# EAGLE board DistributedVisionSchematicPage1_3 4 (EAGLE 9.6.2), part 1 of 2
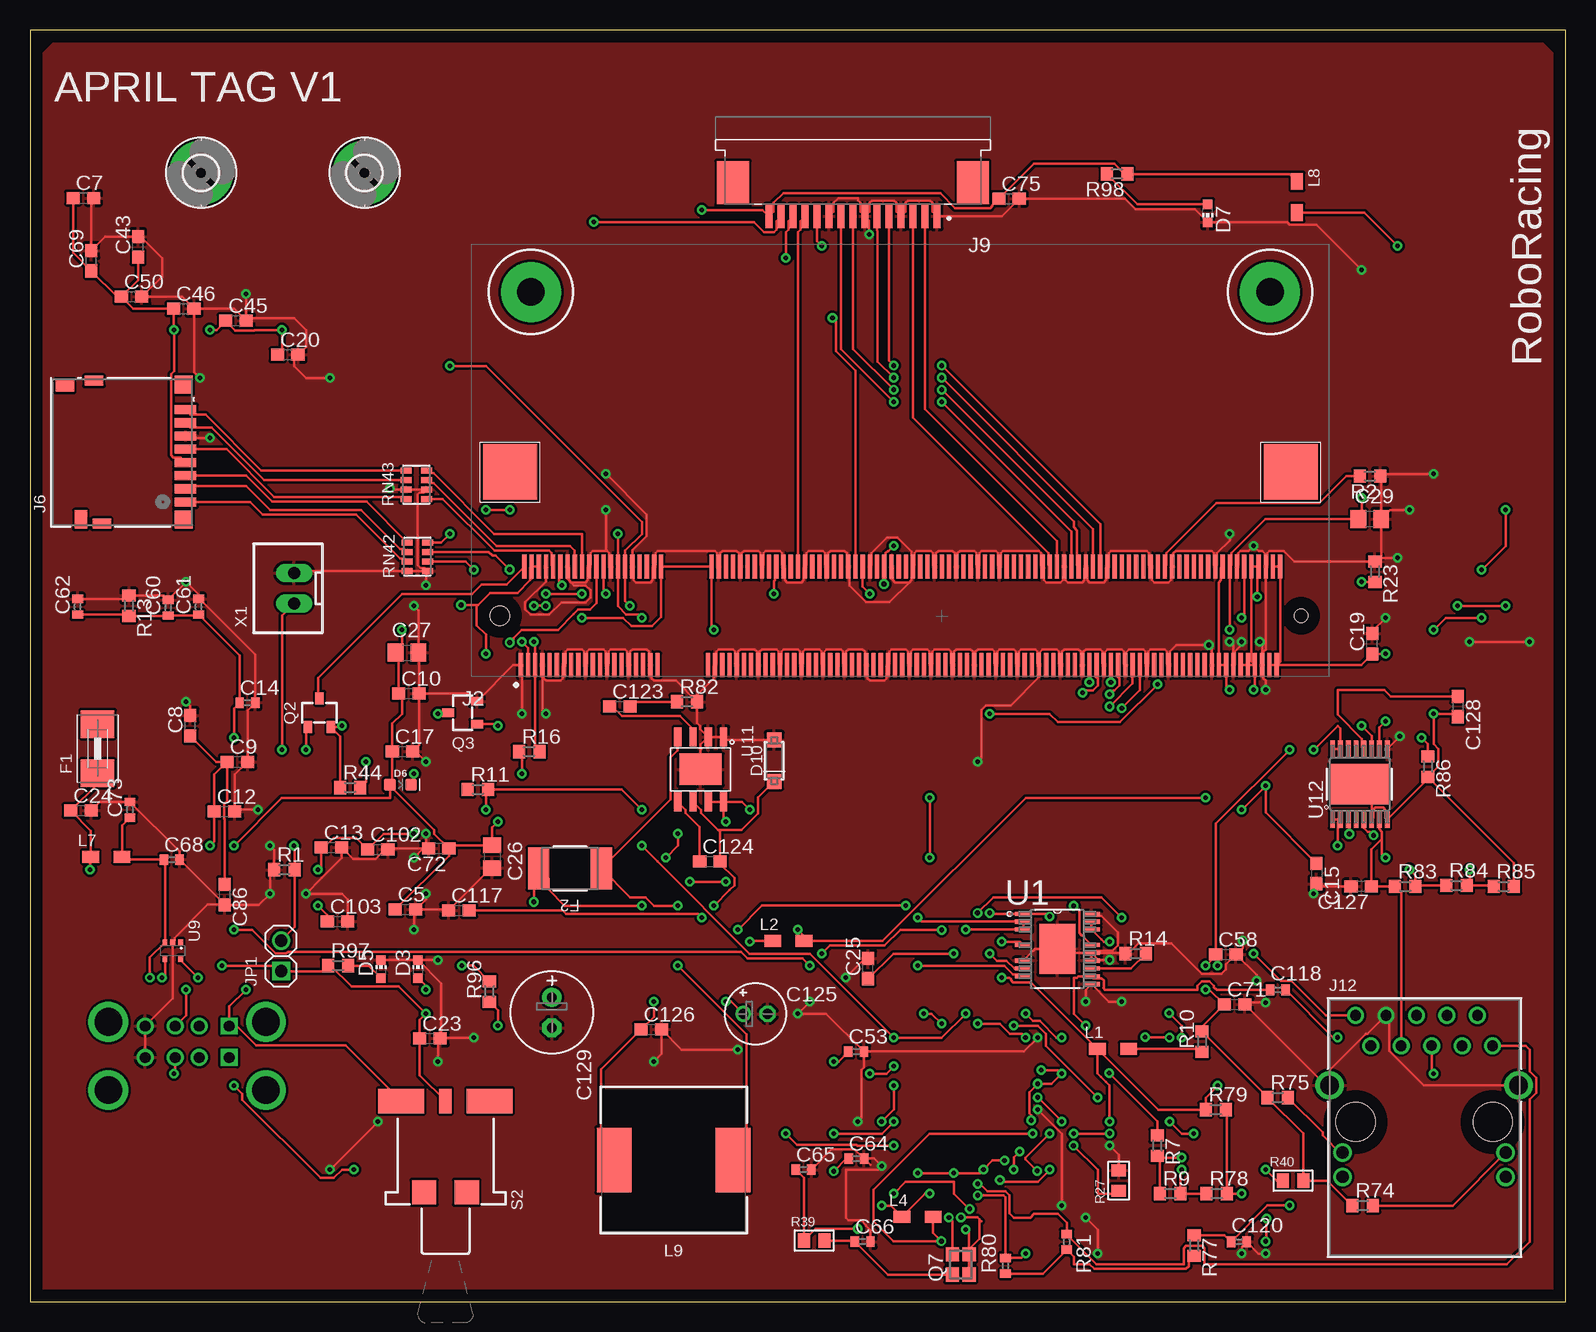
[diagram p0: board, top side]
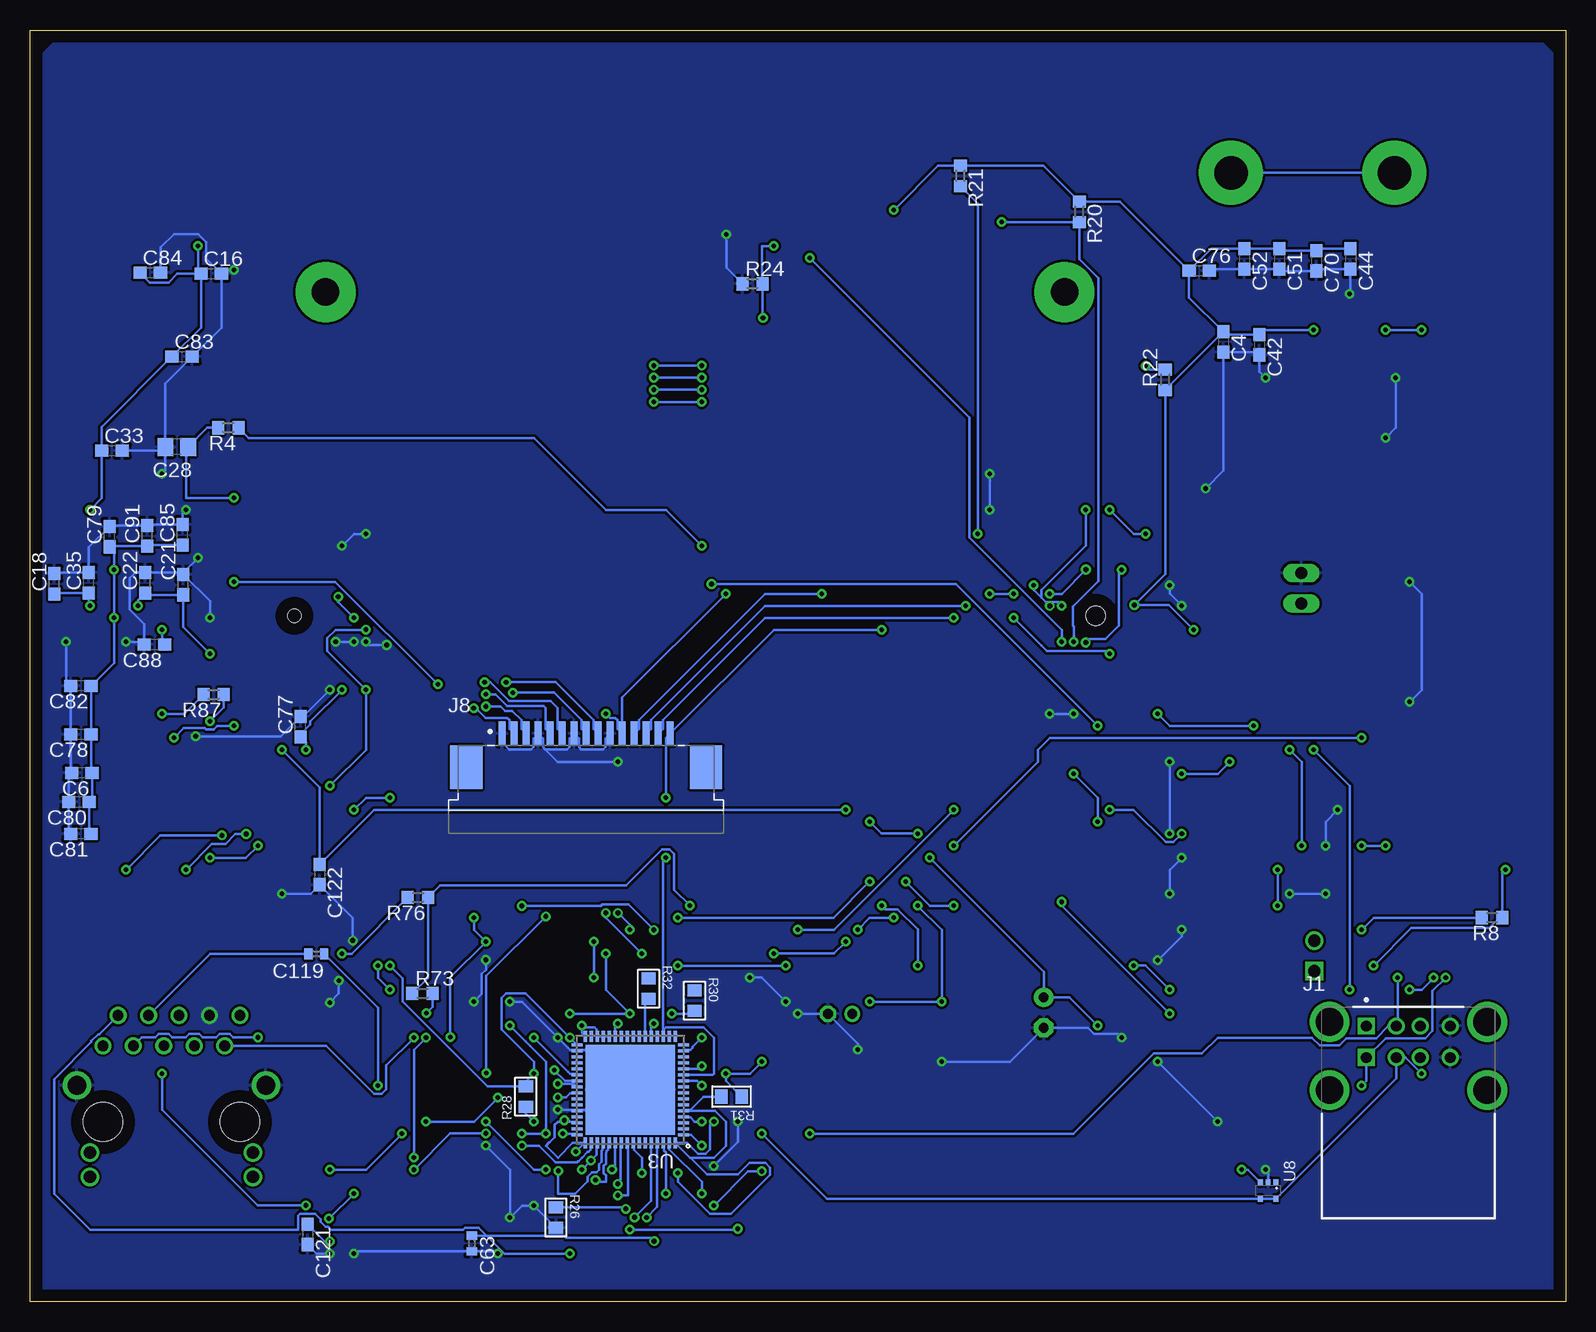
[diagram p1: board, bottom side, seen from below]

Size 128 x 106 mm. Coordinates in mm from the lower left corner, seen from the top.
Outline: 0,0 128,0 128,106 0,106 0,0
Copper layers (1*16): Top 0.035mm / dielectric 1.5mm / Bottom 0.035mm
Design rules "default": minimum track width 6mil, minimum drill 0.35mm, track to track 6mil, track to pad 6mil, pad to pad 6mil, via to via 6mil, smd to smd 6mil, copper to edge 40mil, drill to drill 6mil, minimum pad ring 10mil, minimum via ring 8mil, stop-mask expansion 4mil, vias tented up to drill 0mil, thermal gap 10mil
Net classes: 0 default: width 0.203 mm, drill 0.4 mm, clearance 0.203 mm; 1 power: width 0.203 mm, drill 0.4 mm, clearance 0.203 mm to class 0, clearance 0.203 mm; 2 ethernet: width 0.16 mm, drill 0.3 mm, clearance 0.152 mm; 3 spi: width 0.207 mm, drill 0.35 mm

## Footprints (pad centres in the part's own frame; a part is rotated, then mirrored left to right if it is on the bottom)
C0603 = smd 1.1 x 1: 1 -0.85,0; 2 0.85,0
C0402 = smd 0.7 x 0.9: 1 -0.65,0; 2 0.65,0
C0805 = smd 1.3 x 1.5: 1 -0.95,0; 2 0.95,0
E2-5 = drill 0.813 pad 1.27: + -1.016,0 | drill 0.813 pad 1.27 octagon: - 1.016,0
E2,5-7 = drill 0.813 pad 1.6: + -1.27,0 | drill 0.813 pad 1.6 octagon: - 1.27,0
CHIP-LED0603 = smd 0.8 x 0.8: A 0,-0.75; C 0,0.75
LED-0603 = smd 1 x 1: A -0.877,0; C 0.877,0
SOD123FL_DIO = smd 1.25 x 1.22: 1 -1.725,0; 2 1.725,0
1812 = smd 2.286 x 2.794: 1 -2.046,0; 2 2.046,0
0ZCG_BEL = smd 1.778 x 3.505: 1 -2.616,0; 2 2.616,0
2,8-PAD = drill 2.8 pad 5.334: B2,8 0,0
SAMTEC_USBR-A-D-F-O-TH = drill 0.9 square: A01 0,0; B01 0,-2.62 | drill 0.9: A02 2.5,0; A03 4.5,0; A04 7,0; B02 2.5,-2.62; B03 4.5,-2.62; B04 7,-2.62 | drill 2.3: S1 -3.07,0.35; S2 10.07,0.35; S3 10.07,-5.33; S4 -3.07,-5.33
TE_1473149-4_WITH_CM3PLUS = smd 0.35 x 2: 1 -35.1,-4.1; 2 -34.8,4.1; 3 -34.5,-4.1; 4 -34.2,4.1; 5 -33.9,-4.1; 6 -33.6,4.1; 7 -33.3,-4.1; 8 -33,4.1; 9 -32.7,-4.1; 10 -32.4,4.1; 11 -32.1,-4.1; 12 -31.8,4.1; 13 -31.5,-4.1; 14 -31.2,4.1; 15 -30.9,-4.1; 16 -30.6,4.1; 17 -30.3,-4.1; 18 -30,4.1; 19 -29.7,-4.1; 20 -29.4,4.1; 21 -29.1,-4.1; 22 -28.8,4.1; 23 -28.5,-4.1; 24 -28.2,4.1; 25 -27.9,-4.1; 26 -27.6,4.1; 27 -27.3,-4.1; 28 -27,4.1; 29 -26.7,-4.1; 30 -26.4,4.1; 31 -26.1,-4.1; 32 -25.8,4.1; 33 -25.5,-4.1; 34 -25.2,4.1; 35 -24.9,-4.1; 36 -24.6,4.1; 37 -24.3,-4.1; 38 -24,4.1; 39 -23.7,-4.1; 40 -23.4,4.1; 41 -19.5,-4.1; 42 -19.2,4.1; 43 -18.9,-4.1; 44 -18.6,4.1; 45 -18.3,-4.1; 46 -18,4.1; 47 -17.7,-4.1; 48 -17.4,4.1; 49 -17.1,-4.1; 50 -16.8,4.1; 51 -16.5,-4.1; 52 -16.2,4.1; 53 -15.9,-4.1; 54 -15.6,4.1; 55 -15.3,-4.1; 56 -15,4.1; 57 -14.7,-4.1; 58 -14.4,4.1; 59 -14.1,-4.1; 60 -13.8,4.1; 61 -13.5,-4.1; 62 -13.2,4.1; 63 -12.9,-4.1; 64 -12.6,4.1; 65 -12.3,-4.1; 66 -12,4.1; 67 -11.7,-4.1; 68 -11.4,4.1; 69 -11.1,-4.1; 70 -10.8,4.1; 71 -10.5,-4.1; 72 -10.2,4.1; 73 -9.9,-4.1; 74 -9.6,4.1; 75 -9.3,-4.1; 76 -9,4.1; 77 -8.7,-4.1; 78 -8.4,4.1; 79 -8.1,-4.1; 80 -7.8,4.1; 81 -7.5,-4.1; 82 -7.2,4.1; 83 -6.9,-4.1; 84 -6.6,4.1; 85 -6.3,-4.1; 86 -6,4.1; 87 -5.7,-4.1; 88 -5.4,4.1; 89 -5.1,-4.1; 90 -4.8,4.1; 91 -4.5,-4.1; 92 -4.2,4.1; 93 -3.9,-4.1; 94 -3.6,4.1; 95 -3.3,-4.1; 96 -3,4.1; 97 -2.7,-4.1; 98 -2.4,4.1; 99 -2.1,-4.1; 100 -1.8,4.1; 101 -1.5,-4.1; 102 -1.2,4.1; 103 -0.9,-4.1; 104 -0.6,4.1; 105 -0.3,-4.1; 106 0,4.1; 107 0.3,-4.1; 108 0.6,4.1; 109 0.9,-4.1; 110 1.2,4.1; 111 1.5,-4.1; 112 1.8,4.1; 113 2.1,-4.1; 114 2.4,4.1; 115 2.7,-4.1; 116 3,4.1; 117 3.3,-4.1; 118 3.6,4.1; 119 3.9,-4.1; 120 4.2,4.1; 121 4.5,-4.1; 122 4.8,4.1; 123 5.1,-4.1; 124 5.4,4.1; 125 5.7,-4.1; 126 6,4.1; 127 6.3,-4.1; 128 6.6,4.1; 129 6.9,-4.1; 130 7.2,4.1; 131 7.5,-4.1; 132 7.8,4.1; 133 8.1,-4.1; 134 8.4,4.1; 135 8.7,-4.1; 136 9,4.1; 137 9.3,-4.1; 138 9.6,4.1; 139 9.9,-4.1; 140 10.2,4.1; 141 10.5,-4.1; 142 10.8,4.1; 143 11.1,-4.1; 144 11.4,4.1; 145 11.7,-4.1; 146 12,4.1; 147 12.3,-4.1; 148 12.6,4.1; 149 12.9,-4.1; 150 13.2,4.1; 151 13.5,-4.1; 152 13.8,4.1; 153 14.1,-4.1; 154 14.4,4.1; 155 14.7,-4.1; 156 15,4.1; 157 15.3,-4.1; 158 15.6,4.1; 159 15.9,-4.1; 160 16.2,4.1; 161 16.5,-4.1; 162 16.8,4.1; 163 17.1,-4.1; 164 17.4,4.1; 165 17.7,-4.1; 166 18,4.1; 167 18.3,-4.1; 168 18.6,4.1; 169 18.9,-4.1; 170 19.2,4.1; 171 19.5,-4.1; 172 19.8,4.1; 173 20.1,-4.1; 174 20.4,4.1; 175 20.7,-4.1; 176 21,4.1; 177 21.3,-4.1; 178 21.6,4.1; 179 21.9,-4.1; 180 22.2,4.1; 181 22.5,-4.1; 182 22.8,4.1; 183 23.1,-4.1; 184 23.4,4.1; 185 23.7,-4.1; 186 24,4.1; 187 24.3,-4.1; 188 24.6,4.1; 189 24.9,-4.1; 190 25.2,4.1; 191 25.5,-4.1; 192 25.8,4.1; 193 26.1,-4.1; 194 26.4,4.1; 195 26.7,-4.1; 196 27,4.1; 197 27.3,-4.1; 198 27.6,4.1; 199 27.9,-4.1; 200 28.2,4.1 | smd 4.5 x 4.6: 201 -36,12; 202 29.1,12 | drill 2.3 pad 5: MH1 -34.25,27; MH2 27.35,27 | hole 1.6: -36.85,0 | hole 1.1: 29.95,0
CONN8_DM3D-SF_HIR = smd 0.762 x 1.803: 1 -4.149,-5.271; 2 -3.049,-5.271; 3 -1.949,-5.271; 4 -0.849,-5.271; 5 0.251,-5.271; 6 1.351,-5.271; 7 2.451,-5.271; 8 3.551,-5.271 | smd 1.499 x 1.499: 9 -5.625,-5.118; 10 5.625,-5.118 | smd 0.838 x 1.549: 11 -5.955,1.706; 12 5.955,2.356 | smd 1.549 x 1.041: 13 -5.6,3.46 | smd 1.041 x 1.549: 14 5.554,4.781
TE_1-84952-5 = smd 0.61 x 2: 1 -7,0; 2 -6,0; 3 -5,0; 4 -4,0; 5 -3,0; 6 -2,0; 7 -1,0; 8 0,0; 9 1,0; 10 2,0; 11 3,0; 12 4,0; 13 5,0; 14 6,0; 15 7,0 | smd 2.68 x 3.6: S1 -9.99,-2.8; S2 9.99,-2.8
CONN_EW_ABR = drill 0.89 pad 1.397: 1 5.715,0; 2 4.445,2.54; 3 3.175,0; 4 1.905,2.54; 6 -0.635,2.54; 7 -1.905,0; 8 -3.175,2.54; 9 -4.445,0; 10 -5.715,2.54 | drill 0.889 pad 1.397: 5 0.635,0 | drill 1.57 pad 2.083: CH1 -7.875,-3.3; CH2 7.875,-3.3 | drill 1.02 pad 1.524: L1 -6.8,-8.9; L2 -6.8,-10.93; L3 6.8,-8.9; L4 6.8,-10.93 | hole 3.25: 5.715,-6.35; -5.715,-6.35
1X02 = drill 1.016 square: 1 -1.27,0 | drill 1.016: 2 1.27,0
0805 = smd 1.4 x 1: 1 -1.3,0; 2 1.3,0
WE-PD_1210 = smd 2.9 x 5.4: 1 -4.95,0; 2 4.95,0
SOT-23-3 = smd 0.7 x 1: 1 -0.95,-1.2; 2 0.95,-1.2; 3 0,1.2
FA-20H = smd 1.2 x 1.1: 1 -0.85,-0.7; 2 0.85,-0.7; 3 0.85,0.7; 4 -0.85,0.7
R0603 = smd 1 x 1.1: 1 -0.85,0; 2 0.85,0
RC0805N = smd 1.006 x 1.2: 1 -0.853,0; 2 0.853,0
R0402 = smd 0.7 x 0.9: 1 -0.65,0; 2 0.65,0
RA-4_1206 = smd 0.5 x 0.9: 1 -1.2,-0.85; 2 -1.2,0.85; 3 -0.4,-0.85; 4 -0.4,0.85; 5 0.4,-0.85; 6 0.4,0.85; 7 1.2,-0.85; 8 1.2,0.85
34EWMSP12M6RT = smd 3.81 x 2.03: 1 -3.685,0; 3 3.685,0 | smd 1.02 x 2.03: 2 0,0 | smd 2.03 x 2.03: LEG1 -1.78,7.62; LEG3 1.78,7.62
SOP65P640X175-21N = smd 1.422 x 0.356: 1 -2.845,2.921; 2 -2.845,2.286; 3 -2.845,1.626; 5 -2.845,0.33; 7 -2.845,-0.965; 8 -2.845,-1.626; 9 -2.845,-2.286; 11 2.845,-2.921; 12 2.845,-2.286; 13 2.845,-1.626; 14 2.845,-0.965; 15 2.845,-0.33; 16 2.845,0.33; 18 2.845,1.626; 19 2.845,2.286; 20 2.845,2.921 | smd 2.997 x 4.191: 21 0,0
QFN64_9X9MC_MCH-M = smd 0.908 x 0.255: 1 -4.442,3.75; 2 -4.442,3.25; 3 -4.442,2.75; 4 -4.442,2.25; 5 -4.442,1.75; 6 -4.442,1.25; 7 -4.442,0.75; 8 -4.442,0.25; 9 -4.442,-0.25; 10 -4.442,-0.75; 11 -4.442,-1.25; 12 -4.442,-1.75; 13 -4.442,-2.25; 14 -4.442,-2.75; 15 -4.442,-3.25; 16 -4.442,-3.75; 33 4.442,-3.75; 34 4.442,-3.25; 35 4.442,-2.75; 36 4.442,-2.25; 37 4.442,-1.75; 38 4.442,-1.25; 39 4.442,-0.75; 40 4.442,-0.25; 41 4.442,0.25; 42 4.442,0.75; 43 4.442,1.25; 44 4.442,1.75; 45 4.442,2.25; 46 4.442,2.75; 47 4.442,3.25; 48 4.442,3.75 | smd 0.255 x 0.908: 17 -3.75,-4.442; 18 -3.25,-4.442; 19 -2.75,-4.442; 20 -2.25,-4.442; 21 -1.75,-4.442; 22 -1.25,-4.442; 23 -0.75,-4.442; 24 -0.25,-4.442; 25 0.25,-4.442; 26 0.75,-4.442; 27 1.25,-4.442; 28 1.75,-4.442; 29 2.25,-4.442; 30 2.75,-4.442; 31 3.25,-4.442; 32 3.75,-4.442; 49 3.75,4.442; 50 3.25,4.442; 51 2.75,4.442; 52 2.25,4.442; 53 1.75,4.442; 54 1.25,4.442; 55 0.75,4.442; 56 0.25,4.442; 57 -0.25,4.442; 58 -0.75,4.442; 59 -1.25,4.442; 60 -1.75,4.442; 61 -2.25,4.442; 62 -2.75,4.442; 63 -3.25,4.442; 64 -3.75,4.442 | smd 7.493 x 7.493: 65 0,0
SC70-5 = smd 0.5 x 0.4: 1 -0.7,0.65; 2 -0.7,0; 3 -0.7,-0.65; 4 0.7,-0.65; 6 0.7,0.65
SOIC-8-EXPOSED_PAD = smd 1.6 x 0.61: 1 -2.7,1.905; 2 -2.7,0.635; 3 -2.7,-0.635; 4 -2.7,-1.905; 5 2.7,-1.905; 6 2.7,-0.635; 7 2.7,0.635; 8 2.7,1.905 | smd 2.62 x 3.51: 9 0,0
PWP0016H_N = smd 1.4 x 0.4: 1 -2.95,2.275; 2 -2.95,1.625; 3 -2.95,0.975; 4 -2.95,0.325; 5 -2.95,-0.325; 6 -2.95,-0.975; 7 -2.95,-1.625; 8 -2.95,-2.275; 9 2.95,-2.275; 10 2.95,-1.625; 11 2.95,-0.975; 12 2.95,-0.325; 13 2.95,0.325; 14 2.95,0.975; 15 2.95,1.625; 16 2.95,2.275 | smd 3.4 x 5: 17 0,0
JST-XH-02-PACKAGE-LONG-PAD = drill 1.016 long: 1 -1.17,-0.5; 2 1.37,-0.5

## Placement (x,y rotation side)
C4  10n  [C0603]  28.53,80 270 bottom
C5  100n  [C0603]  31.29,32.68 0 top
C6  100n  [C0603]  123.68,44.06 180 bottom
C7  10u  [C0603]  4.45,92 0 top
C8  10n  [C0603]  13.37,48 90 top
C9  10n  [C0603]  17.29,45 0 top
C10  100n  [C0603]  31.59,50.68 0 top
C12  10u  [C0603]  16.21,40.84 0 top
C13  10n  [C0603]  25.13,37.84 0 top
C14  1u  [C0402]  18.13,49.92 0 top
C15  100n  [C0603]  107.24,35.68 270 top
C16  100n  [C0603]  112.89,85.68 0 bottom
C17  10u  [C0603]  31.05,45.84 0 top
C18  10n  [C0603]  125.97,59.84 90 bottom
C19  10n  [C0603]  111.89,54.84 90 top
C20  10n  [C0603]  21.49,78.92 0 top
C21  100n  [C0603]  115.22,59.76 90 bottom
C22  10u  [C0603]  118.41,59.92 90 bottom
C23  22u  [C0603]  33.33,21.92 0 top
C24  22u  [C0603]  4.25,40.92 0 top
C25  470n  [C0603]  69.87,27.76 90 top
C26  22u  [C0805]  38.51,37.09 270 top
C27  22u  [C0805]  31.43,54.09 0 top
C28  22u  [C0805]  115.76,71.25 180 bottom
C29  22u  [C0805]  111.68,65.25 0 top
C33  10n  [C0603]  121.17,70.92 0 bottom
C35  10u  [C0603]  123.09,59.92 90 bottom
C42  100n  [C0603]  25.52,79.76 270 bottom
C43  4u7  [C0603]  9.01,87.92 90 top
C44  4u7  [C0603]  17.93,86.92 270 bottom
C45  100n  [C0603]  17.17,81.76 0 top
C46  100n  [C0603]  12.82,82.76 0 top
C50  100n  [C0603]  8.47,83.76 0 top
C51  10n  [C0603]  23.85,86.92 270 bottom
C52  10n  [C0603]  26.77,86.92 270 bottom
C53  100n  [C0402]  68.87,20.84 0 top
C58  10n  [C0603]  99.69,28.92 0 top
C60  100n  [C0402]  11.52,57.84 90 top
C61  10n  [C0402]  14.05,57.92 90 top
C62  4u7  [C0402]  3.97,57.92 90 top
C63  100n  [C0402]  91.17,4.84 270 bottom
C64  1u  [C0402]  68.89,11.92 0 top
C65  33p  [C0402]  64.49,11 0 top
C66  33p  [C0402]  69.41,5 0 top
C68  100n  [C0402]  11.82,36.84 0 top
C69  100n  [C0603]  5.12,86.76 90 top
C70  100n  [C0603]  20.77,86.76 270 bottom
C71  100n  [C0603]  100.42,24.76 0 top
C72  100n  [C0603]  34.07,37.76 180 top
C73  10u  [C0402]  8.33,41 90 top
C75  10n  [C0603]  81.61,91.92 0 top
C76  10n  [C0603]  30.53,85.92 0 bottom
C77  10n  [C0603]  105.45,47.92 90 bottom
C78  100n  [C0603]  123.76,47.28 180 bottom
C79  100n  [C0603]  121.37,63.76 90 bottom
C80  10n  [C0603]  123.92,41.63 180 bottom
C81  100n  [C0603]  123.76,38.98 180 bottom
C82  100n  [C0603]  123.76,51.33 180 bottom
C83  100n  [C0603]  115.32,78.76 0 bottom
C84  100n  [C0603]  117.97,85.76 0 bottom
C85  10n  [C0603]  115.29,63.92 90 bottom
C86  10n  [C0603]  16.21,33.92 270 top
C88  100n  [C0603]  117.62,54.76 180 bottom
C91  100n  [C0603]  118.22,63.84 90 bottom
C102  10u  [C0603]  28.99,37.68 0 top
C103  10u  [C0603]  25.64,31.68 0 top
C117  10000pF  [C0603]  35.75,32.6 0 top
C118  10000pF  [C0402]  104.02,25.98 0 top
C119  10000pF  [C0402]  104.13,28.98 180 bottom
C120  0.1uF  [C0402]  100.78,4.98 0 top
C121  10000pF  [C0603]  104.86,5.6 270 bottom
C122  10000pF, 50V  [C0603]  103.87,35.6 270 bottom
C123  0.022uF, 50V  [C0603]  49.17,49.6 0 top
C124  0.220uF  [C0603]  56.68,36.68 0 top
C125  100uF  [E2-5]  60.47,23.98 0 top
C126  0.220uF  [C0603]  51.79,22.68 0 top
C127  1uF, 50V  [C0603]  110.97,34.6 180 top
C128  2.2uF, 50V  [C0603]  119.01,49.6 270 top
C129  100uF, 35V  [E2,5-7]  43.5,24.09 270 top
D3  GRN  [CHIP-LED0603]  32.34,27.71 0 top
D5  GRN  [CHIP-LED0603]  29.26,27.71 0 top
D6  GREEN  [LED-0603]  30.89,43.08 0 top
D7  GRN  [CHIP-LED0603]  98.18,90.71 180 top
D10  NTS260ESFT3G  [SOD123FL_DIO]  62.04,45.08 90 top
F1  2A  [1812]  5.64,46.09 90 top
F2  1A (Trip)  [0ZCG_BEL]  45.01,36.09 180 top
H1  MOUNT-PAD-ROUND2.8  [2,8-PAD]  27.88,94.09 0 top
H2  MOUNT-PAD-ROUND2.8  [2,8-PAD]  14.26,94.09 0 top
J1  USBR-A-D-F-O-TH  [SAMTEC_USBR-A-D-F-O-TH]  16.6,22.96 0 bottom
J2  RASPBERRRY_COMPUTE_CM3  [TE_1473149-4_WITH_CM3PLUS]  76.01,57.16 0 top
J6  DM3D-SF  [CONN8_DM3D-SF_HIR]  7.69,70.8 90 top
J8  1-84952-5  [TE_1-84952-5]  81.64,47.34 0 bottom
J9  1-84952-5  [TE_1-84952-5]  68.6,90.47 180 top
J12  ARJM11C7-104-AB-EW2  [CONN_EW_ABR]  116.21,21.32 0 top
JP1  [1X02]  20.93,28.81 90 top
L1  4A  [0805]  90.29,21.08 0 top
L2  4A  [0805]  63.21,30.08 0 top
L4  1.3A 120r  [0805]  73.99,7.08 0 top
L7  1.3A 120r  [0805]  6.37,37.08 0 top
L8  1.3A 120r  [0805]  105.61,92.08 270 top
L9  47uH  [WE-PD_1210]  53.66,11.8 180 top
Q2  BSS127  [SOT-23-3]  24.13,49.08 0 top
Q3  BSS127  [SOT-23-3]  36.05,49.08 90 top
Q7  25 MHz  [FA-20H]  77.59,3.09 90 top
R1  47k  [R0603]  21.21,36 0 top
R2  [R0603]  111.7,68.81 180 top
R4  100k  [R0603]  111.47,72.84 180 bottom
R7  5r1  [R0603]  93.97,13 270 top
R8  47k  [R0603]  6.13,32 180 bottom
R9  47k  [R0603]  95.05,9 0 top
R10  31.6k  [R0603]  97.69,21.68 90 top
R11  12.7k  [R0603]  37.34,42.68 0 top
R13  10k  [R0603]  8.25,58 270 top
R14  10k  [R0603]  92.17,29 0 top
R16  4.7k  [R0603]  41.61,45.84 0 top
R20  4.7k  [R0603]  40.53,90.84 270 bottom
R21  4.7k  [R0603]  50.45,93.84 270 bottom
R22  4.7k  [R0603]  33.37,76.84 90 bottom
R23  100k  [R0603]  112.12,60.84 270 top
R24  100k  [R0603]  67.77,84.84 0 bottom
R26  12k  [RC0805N]  84.16,7 270 bottom
R27  12.4k  [RC0805N]  90.76,10.08 90 top
R28  4.7k  [RC0805N]  86.68,17.08 90 bottom
R30  4.7k  [RC0805N]  72.6,25.08 270 bottom
R31  4.7k  [RC0805N]  69.52,17.08 180 bottom
R32  4.7k  [RC0805N]  76.44,26.08 270 bottom
R39  1M  [RC0805N]  65.36,5.08 0 top
R40  4k7  [RC0805N]  105.28,10.08 0 top
R44  470r  [R0603]  26.69,42.84 0 top
R73  75, 1%  [R0603]  95.28,25.68 0 bottom
R74  470  [R0603]  111.09,8 0 top
R75  470  [R0603]  104.01,17 0 top
R76  75, 1%  [R0603]  95.66,33.68 180 bottom
R77  22, 1%  [R0603]  97.04,4.68 270 top
R78  10k  [R0603]  98.93,9 0 top
R79  10k  [R0603]  98.85,16 0 top
R80  49.9, 1%  [R0402]  81.31,2.98 90 top
R81  49.9, 1%  [R0402]  86.42,4.98 270 top
R82  22k  [R0603]  54.77,50 0 top
R83  715k, 1%  [R0603]  114.64,34.6 0 top
R84  20k, 1%  [R0603]  118.9,34.68 0 top
R85  30.1k, 1%  [R0603]  122.85,34.6 0 top
R86  11.8k, 1%  [R0603]  116.53,44.6 270 top
R87  66.5k, 1%  [R0603]  112.69,50.6 180 bottom
R96  4.7k  [R0603]  38.29,25.84 90 top
R97  330  [R0603]  25.69,28 0 top
R98  470  [R0603]  90.61,94 180 top
RN42  22  [RA-4_1206]  32.29,62.09 90 top
RN43  22  [RA-4_1206]  32.21,68.09 90 top
S2  34EWMSP12M6RT  [34EWMSP12M6RT]  34.63,16.72 180 top
U1  LM26420XMH  [SOP65P640X175-21N]  85.64,29.39 0 top
U3  LAN9513-JZXQFN64_9X9MC_MCH-M  [QFN64_9X9MC_MCH-M]  77.96,17.66 180 bottom
U8  SP3003-02  [SC70-5]  24.79,9.25 270 bottom
U9  SP3003-02  [SC70-5]  11.9,29.25 270 top
U11  IFX91041  [SOIC-8-EXPOSED_PAD]  55.9,44.36 270 top
U12  TPS26600PWPR  [PWP0016H_N]  110.86,43.12 90 top
X1  JST-XH-02-PIN-LONG-PAD  [JST-XH-02-PACKAGE-LONG-PAD]  21.52,59.36 90 top

## Library data of the parts
C4-C10 C12-C29 C33 C35 C42-C46 C50-C53 C58 C60-C66 C68-C73 C75-C86 C88 C91 C102 C103 C117 C121-C124 C126-C128 = rcl; SPICEPREFIX: C
C118-C120 R80 R81 = adafruit
C125 = rcl; DKPN: 732-8598-1-ND; SPICEPREFIX: C
C129 = rcl; DKPN: 732-8942-1-ND; SPICEPREFIX: C
D3 D5 D7 = led
D6 = RoboJackets-LEDs; PROD_ID: DIO-00821
D10 = ethernet_poe; DKPN: NTS260ESFT3GOSCT-ND
F1 = RoboJackets-Fuses
F2 = ethernet_poe; DKPN: 507-1762-1-ND
H1 H2 = holes
J1 = USBR-A-D-F-O-TH; DESCRIPTION: USB-A (USB TYPE-A) USB 2.0 Receptacle Connector 8 Position Through Hole, Right Angle; DIGI-KEY_PART_NUMBER: SAM10376-ND; MF: Samtec; MP: USBR-A-D-F-O-TH; PACKAGE: None; PURCHASE-URL: https://pricing.snapeda.com/search/part/USBR-A-D-F-O-TH/?ref=eda
J2 = distributed-vision; DKPN: 1690-1031-ND
J6 = distributed-vision; DKPN: HR1941CT-ND
J8 J9 = 1-84952-5; COMMENT: 1-84952-5; DESCRIPTION: Conn FPC Connector SKT 15 POS 1mm Solder RA SMD T/R; DIGI-KEY_PART_NUMBER: A101391CT-ND; EU_ROHS_COMPLIANCE: Compliant; MF: TE Connectivity; MP: 1-84952-5; PACKAGE: None; PURCHASE-URL: https://pricing.snapeda.com/search/part/1-84952-5/?ref=eda
J12 = ethernet_poe; DKPN: 535-14148-ND
JP1 X1 = RoboJackets-Connectors
L1 L2 L4 L7 L8 = RoboJackets-Inductors
L9 = ethernet_poe_v2.1; DATASHEET-URL: https://www.we-online.com/catalog/datasheet/7447709470.pdf; DKPN: 732-1246-1-ND; FRES: 6.5MHz; IR: 3.8A; ISAT: 4.5A; MOUNT: SMT; PART-NUMBER: 7447709470; RDC-MAX: 60mOhm; RDC-TYP: 46mOhm; VERSION: Standard
Q2 Q3 = RoboJackets-Discrete; DKPN: BSS127S-7DICT-ND
Q7 = crystal
R1 R2 R4 R7-R11 R13 R14 R16 R20-R24 R44 R73-R79 R82-R87 R96-R98 = rcl; SPICEPREFIX: R
R26-R28 R30-R32 R39 R40 = RoboJackets-Resistors; DKPN: P50LLCT-ND
RN42 RN43 = RoboJackets-Resistors
S2 = RoboJackets-Switches; DKPN: GH7540CT-ND
U1 = LM26420XMH; AVAILABILITY: Good; DESCRIPTION: Dual 2 A, high-efficiency synchronous DC/DC converter 20-HTSSOP -40 to 125; MF: Texas Instruments; MP: LM26420XMH/NOPB; PACKAGE: HTSSOP-20 Texas Instruments; PRICE: None; PURCHASE-URL: https://pricing.snapeda.com/search/part/LM26420XMH/NOPB/?ref=eda
U3 = distributed-vision; DKPN: LAN9513-JZX-ND
U8 U9 = distributed-vision; DKPN: F3302CT-ND
U11 = ethernet_poe; DKPN: IFX91041EJV50XUMA1CT-ND
U12 = ethernet_poe; DKPN: 296-47292-1-ND

## Nets
3V3_LED: D7.A R98.2
5V_LED: D5.A R97.2
5V_RAW: C124.2 D10.1 L9.1 U11.6
24_LOAD: R87.1 U12.10
24V_LED: D3.A R96.2
+1.8V: C13.1 C15.1 C28.1 C29.1 C102.1 C103.1 J2.183 J2.184 J2.185 J2.186 L2.2 R4.2 R11.2
+3.3V: C4.1 C5.1 C7.1 C8.1 C9.1 C10.1 C12.1 C17.1 C20.1 C26.1 C27.1 C42.1 C43.1 C44.1 C45.1 C46.1 C50.1 C51.1 C52.1 C58.1 C69.1 C70.1 C71.1 C72.1 C75.1 C76.1 C77.1 C86.1 D6.A J2.4 J2.6 J2.40 J2.42 J2.189 J2.190 J2.191 J2.192 J2.193 J2.194 J6.4 J8.15 J9.15 L8.1 R10.2 R16.1 R20.1 R21.1 R22.1 R28.2 R31.2 R40.2 R74.1 R75.1 R98.1 U3.5 U3.10 U3.11 U3.19 U3.27 U3.33 U3.39 U3.40 U3.46 U3.49 U3.51 U3.54 U3.57 U3.64
+3.3V-A: C6.1 C16.1 C33.1 C78.1 C79.1 C80.1 C81.1 C82.1 C83.1 C84.1 C85.1 C88.1 C91.1 L8.2
+3V3_A: R77.2 R80.1 R81.2
+5V: C23.1 C24.1 F1.1 F1.2 F2.2 JP1.1 L7.1 R7.2 R8.1 R9.1 R97.1 S2.2 U1.2 U1.3 U1.18 U1.19
+5V_PREFUSE: C125.+ C126.1 F2.1 L9.2 U11.4
+24V: C127.1 J12.7 R83.1 U12.1 U12.2 U12.7
+24V_FUSE: C122.1 C129.+ R96.1 U11.7 U11.8 U12.15 U12.16
AGND: H1.B2,8 H2.B2,8
BD+: J1.A03 U9.4
BVCC: J1.A01 S2.3 X1.1
CAM0_CN: J2.144 J9.8
CAM0_CP: J2.142 J9.9
CAM0_DN0: J2.138 J9.2
CAM0_DN1: J2.150 J9.5
CAM0_DP0: J2.136 J9.3
CAM0_DP1: J2.148 J9.6
CAM0_IO0: J2.82 J9.11 R24.2
CAM0_IO1: J2.66 J9.12
CAM0_SCL: J2.5 J9.13 R16.2
CAM0_SDA: J2.3 J9.14 R20.2
CAM1_CN: J2.149 J8.8
CAM1_CP: J2.147 J8.9
CAM1_DN0: J2.161 J8.2
CAM1_DN1: J2.155 J8.5
CAM1_DP0: J2.159 J8.3
CAM1_DP1: J2.153 J8.6
CAM1_IO0: J2.84 J8.11 R23.2
CAM1_IO1: J2.60 J8.12
CAM1_SCL: J2.30 J8.13 R22.2
CAM1_SDA: J2.28 J8.14 R21.2
CT: C120.1 J12.5 R77.1
EMMC_DISABLE_N: J2.2 Q2.3
EMMC_EN_N_1V8: J2.90 Q3.1 R4.1
FB1: L1.2 R10.1
G_LED+: J12.L1 R75.2
GND: C4.2 C5.2 C6.2 C7.2 C8.2 C9.2 C10.2 C12.2 C13.2 C14.2 C15.2 C16.2 C17.2 C18.2 C19.2 C20.2 C21.2 C22.2 C23.2 C24.2 C25.2 C26.2 C27.2 C28.2 C29.2 C33.2 C35.2 C42.2 C43.2 C44.2 C45.2 C46.2 C50.2 C51.2 C52.2 C53.2 C58.2 C60.2 C61.2 C62.2 C63.2 C64.2 C65.2 C66.2 C68.2 C69.2 C70.2 C71.2 C72.2 C73.2 C75.2 C76.2 C77.2 C78.2 C79.2 C80.2 C81.2 C82.2 C83.2 C84.2 C85.2 C86.2 C88.2 C91.2 C102.2 C103.2 C117.1 C120.2 C121.2 C122.2 C125.- C126.2 C127.2 C129.- D3.C D5.C D7.C D10.2 J1.A04 J1.B04 J2.1 J2.7 J2.8 J2.13 J2.14 J2.19 J2.20 J2.25 J2.26 J2.31 J2.32 J2.37 J2.38 J2.43 J2.44 J2.49 J2.50 J2.55 J2.56 J2.61 J2.62 J2.67 J2.68 J2.73 J2.74 J2.79 J2.80 J2.85 J2.86 J2.91 J2.92 J2.97 J2.98 J2.103 J2.104 J2.109 J2.110 J2.115 J2.116 J2.121 J2.122 J2.127 J2.133 J2.134 J2.139 J2.140 J2.145 J2.146 J2.151 J2.152 J2.157 J2.163 J2.164 J2.169 J2.170 J2.181 J2.182 J2.187 J2.188 J2.195 J2.196 J6.6 J8.1 J8.4 J8.7 J8.10 J9.1 J9.4 J9.7 J9.10 J12.8 J12.CH1 J12.CH2 Q3.2 R1.1 R2.1 R13.1 R14.1 R23.1 R24.1 R26.2 R27.2 R82.2 RN42.1 RN42.2 RN43.3 RN43.4 U1.7 U1.11 U1.14 U1.15 U1.20 U1.21 U3.34 U3.44 U3.65 U8.2 U9.2 U11.1 U11.2 U11.9 U12.9 X1.2
GPIO0-27_VDD: J2.39
GPIO28-45_VDD: J2.41
GPIO38_RESET: J2.64
N$1: R11.1
N$4: C123.1 U11.3
N$5: C25.1 R7.1 U1.1
N$10: J12.9 R73.2
N$14: J12.10 R76.2
N$15: C124.1 U11.5
N$16: C123.2 R82.1
N$20: C117.2 R73.1 R76.1
N$25: R83.2 R84.1 U12.3
N$28: R84.2 R85.1 U12.5
N$29: C128.1 U12.12
N$31: Q2.2 Q3.3 R44.1
N$32: D6.C R44.2
N$33: JP1.2 Q2.1 R1.2
N$34 [power]: R86.1 U12.11
N$40: R8.2 U1.9
N$46: J6.1 RN42.4
N$47: J6.2 RN42.6
N$48: J6.3 RN42.8
N$49: J6.5 RN43.2
N$50: J6.7 RN43.6
N$51: J6.8 RN43.8
N$55: C64.1 L4.1 U3.62
N$56: C63.1 L4.2 U3.48
N$58: R30.2 U3.21
N$59: R32.2 U3.22
N$61: C53.1 R31.1 U3.12
N$63: R40.1 U3.28 U3.29 U3.30 U3.32
N$64: Q7.3 U3.61
N$65: Q7.1 U3.60
N$66: C66.1 Q7.4 R39.2
N$67: C65.1 Q7.2 R39.1
N$69: R26.1 U3.63
N$70: R28.1 U3.41
N$71: R27.1 U3.50
NLINKA_LED: R30.1
NSPD_LED: R32.1
RD_N [ethernet]: C119.2 J12.4
RD_P [ethernet]: C118.2 J12.3
RTN: C128.2 R85.2 R86.2 R87.2 U12.6 U12.8 U12.17
RX_FILTER: C121.1 R78.2 R79.2
RX_N [ethernet]: C119.1 L1.1 R79.1 U1.5 U3.53
RX_P [ethernet]: C118.1 R9.2 R78.1 U1.12 U3.52
SD_CLK: J2.10 RN43.1
SD_CMD: J2.12 RN42.7
SD_DAT0: J2.16 RN43.5
SD_DAT1: J2.18 RN43.7
SD_DAT2: J2.22 RN42.3
SD_DAT3: J2.24 RN42.5
TVCC: C68.1 C73.1 J1.B01 L7.2 U8.3 U9.3
TX_N [ethernet]: J12.2 R80.2 U3.56
TX_P [ethernet]: J12.1 R81.1 U3.55
USB_DM: U3.58
USB_DP: U3.59
USB_OTGID: J2.168 R2.2
USBDM2: J1.A02 U3.1 U9.6
USBDM3: U3.3
USBDM4: L2.1 U1.16
USBDP2: U3.2
USBDP3: J1.B02 J1.B03 U3.4 U8.4 U8.6
USBDP4: R14.2 U1.13
VBATT: C18.1 C19.1 C21.1 C22.1 C35.1 J2.197 J2.198 J2.199 J2.200
VC_TCK: J2.180
VC_TDO: J2.178
VDD18CORE: C14.1 C60.1 C61.1 C62.1 R13.2 U1.8 U3.15 U3.38
Y_LED+: J12.L3 R74.2